# EAGLE board v0_0 (EAGLE 6.2)
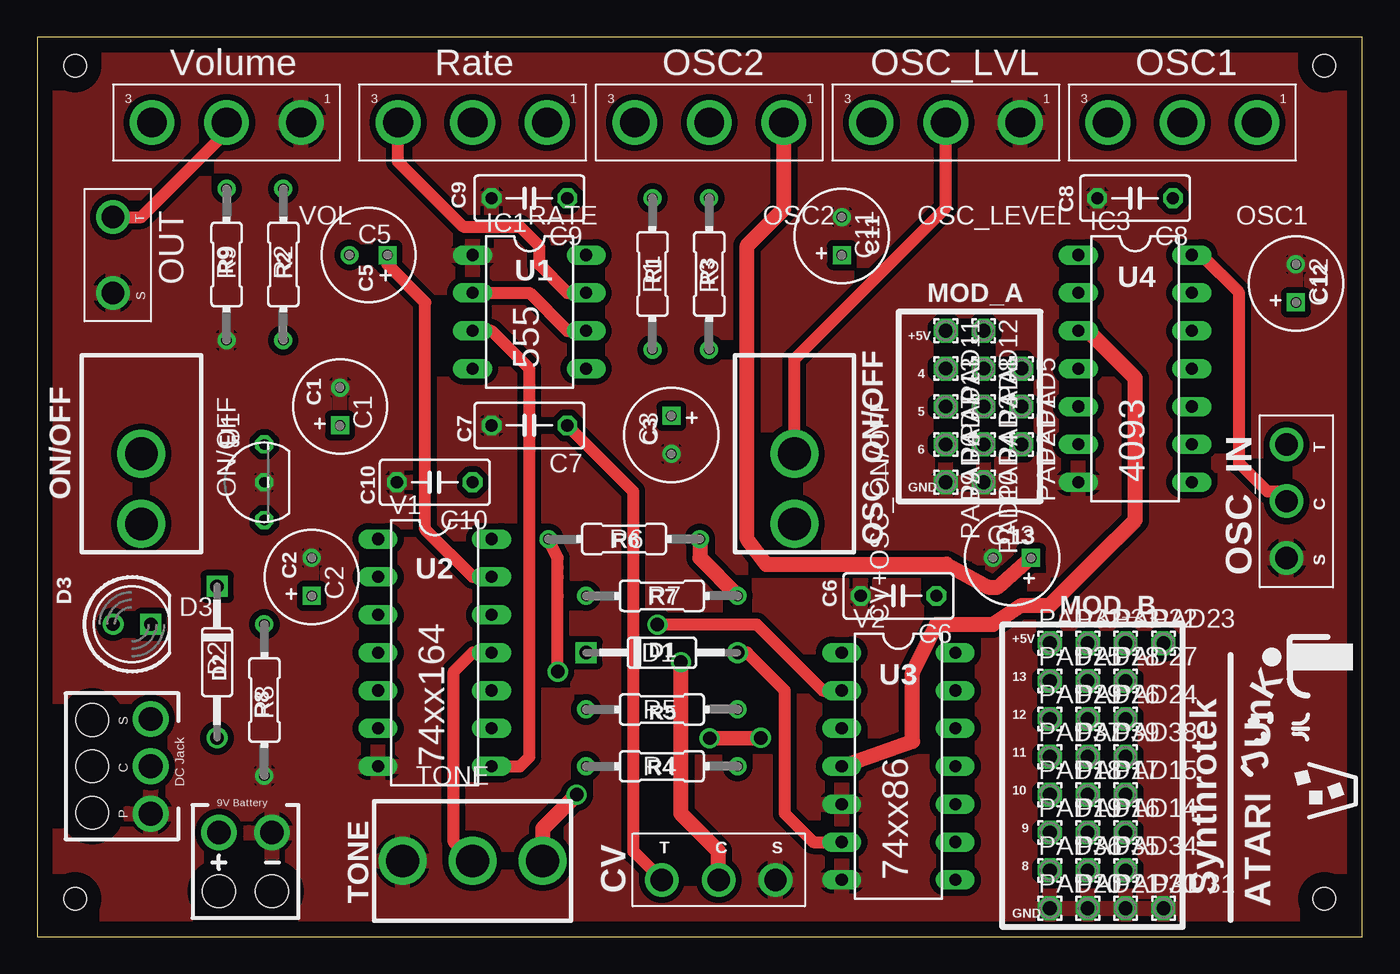
[diagram p0: board, top side]
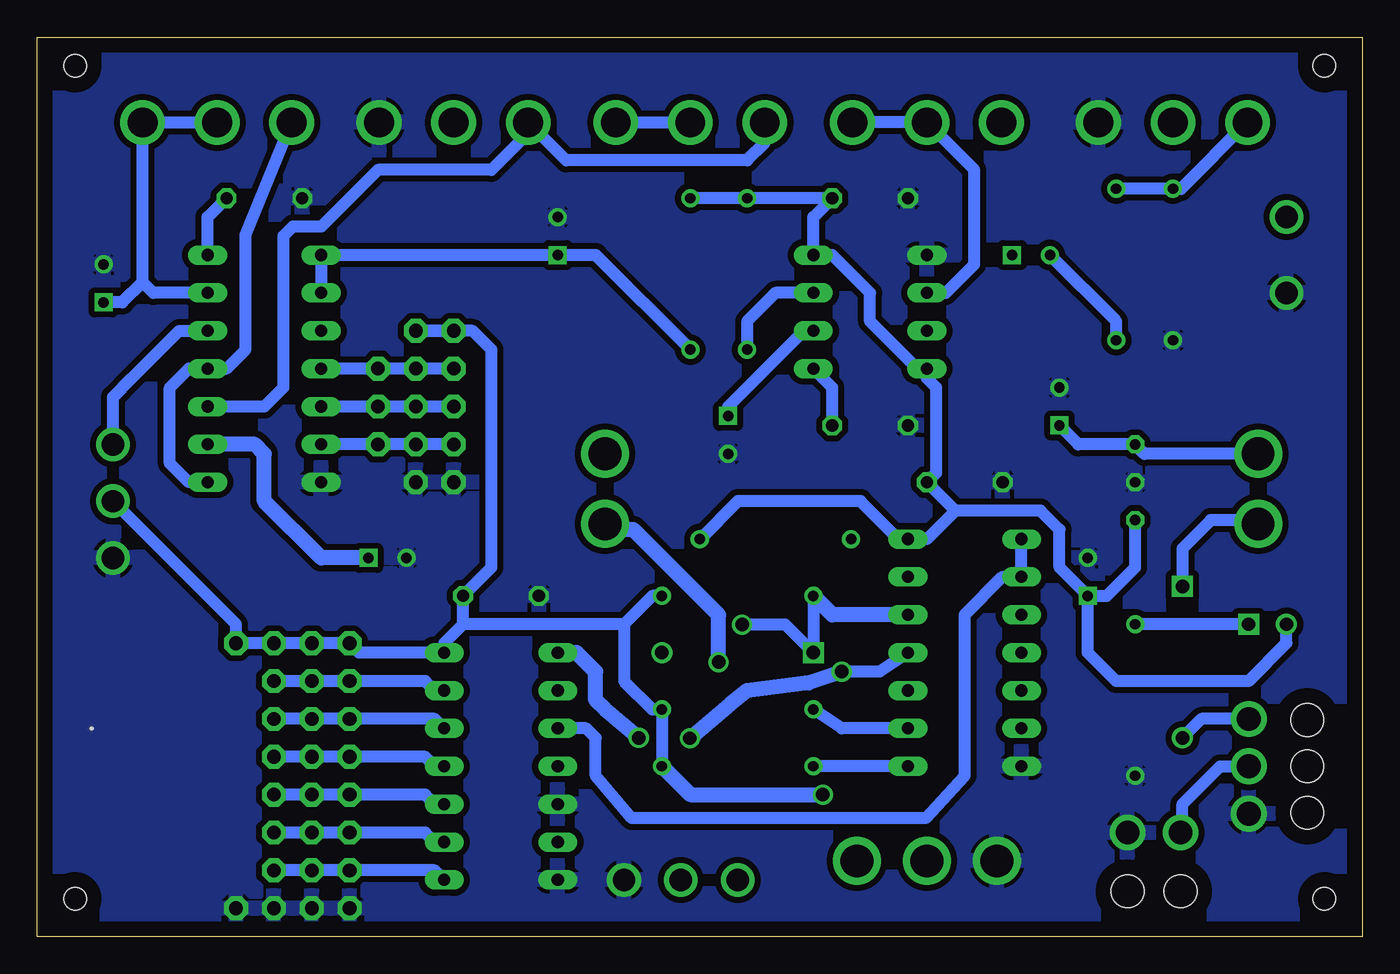
[diagram p1: board, bottom side, seen from below]

Size 88.9 x 60.33 mm. Coordinates in mm from the lower left corner, seen from the top.
Outline: 0,0 88.9,0 88.9,60.33 0,60.33 0,0
Copper layers (1*16): Top 0.035mm / dielectric 1.5mm / Bottom 0.035mm
Design rules: minimum track width 10mil, minimum drill 24mil, track to track 8mil, track to pad 8mil, pad to pad 8mil, via to via 8mil, smd to smd 8mil, copper to edge 40mil, drill to drill 8mil, minimum pad ring 10mil, minimum via ring 8mil, stop-mask expansion 4mil, vias tented up to drill 0mil, thermal gap 10mil
Holes 1.5 mm at 2.54,58.42 86.36,58.42 86.36,2.54 2.54,2.54

## Footprints (pad centres in the part's own frame; a part is rotated, then mirrored left to right if it is on the bottom)
063_025 = drill 0.7 square: + -1.27,0 | drill 0.7: - 1.27,0
C050-030X075 = drill 0.813 octagon: 1 -2.54,0; 2 2.54,0
MONO_JACK_W_SHUNT = drill 1.5: C 0,0; S 3.81,0; T -3.81,0
SPST_TOGGLE_SWITCH = drill 2.2: A 0,0; B 4.7,0
DO35-4 = drill 0.9 pad 1.422: A 5.08,0 | drill 0.9 pad 1.422 square: C -5.08,0
LED5MM = drill 0.9: A -1.27,0 | drill 0.9 square: K 1.27,0
DIL08 = drill 0.813 long: 1 -3.81,-3.81; 2 -1.27,-3.81; 3 1.27,-3.81; 4 3.81,-3.81; 5 3.81,3.81; 6 1.27,3.81; 7 -1.27,3.81; 8 -3.81,3.81
DIL14 = drill 0.813 long: 1 -7.62,-3.81; 2 -5.08,-3.81; 3 -2.54,-3.81; 4 0,-3.81; 5 2.54,-3.81; 6 5.08,-3.81; 7 7.62,-3.81; 8 7.62,3.81; 9 5.08,3.81; 10 2.54,3.81; 11 0,3.81; 12 -2.54,3.81; 13 -5.08,3.81; 14 -7.62,3.81
POT = drill 2: 1 -5,0; 2 0,0; 3 5,0
MONO_JACK = drill 1.5: SLEEVE 2.54,0; TIP -2.54,0
1,6/0,9 = drill 0.914 pad 1.6 octagon: 1 0,0
R0207/4 = drill 0.7: 1 -5.08,0; 2 5.08,0
SPDT_TOGGLE_SWITCH = drill 2.2: A -4.7,0; B 4.7,0; C 0,0
TO-92 = drill 0.7 octagon: 1 -2.54,0; 2 0,0; 3 2.54,0
DC_JACK_OFFBOARD = drill 1.6: CONNECT 0,1.27; PIN 3.175,1.27; SLEEVE -3.175,1.27 | hole 2.2: -3.111,-2.667; 0,-2.667; 3.111,-2.667
9V_BATTERY = drill 1.6: 9V_BATTERY_+ -1.778,1.27; 9V_BATTERY_- 1.778,1.27 | hole 2.2: -1.778,-2.667; 1.778,-2.667

## Placement (x,y rotation side)
C1  100uF  [063_025]  20.32,35.56 90 top
C2  10uF  [063_025]  18.41,24.13 90 top
C3  0.2uF  [063_025]  42.55,33.66 270 top
C5  1.0uF  [063_025]  22.23,45.72 180 top
C6  0.1uF  [C050-030X075]  57.78,22.86 180 top
C7  0.1uF  [C050-030X075]  33.02,34.29 180 top
C8  0.1uF  [C050-030X075]  73.66,49.53 180 top
C9  0.1uF  [C050-030X075]  33.02,49.53 180 top
C10  0.1uF  [C050-030X075]  26.67,30.48 180 top
C11  100uF  [063_025]  53.98,46.99 90 top
C12  2.2uF  [063_025]  84.45,43.81 90 top
C13  0.47uF  [063_025]  65.41,25.4 180 top
CV  MONO_JACK_W_SHUNT  [MONO_JACK_W_SHUNT]  45.72,3.81 0 top
CV+OSC_ON/OFF  SPST_SWITCH  [SPST_TOGGLE_SWITCH]  50.8,32.38 270 top
D1  1N4148-4  [DO35-4]  41.91,19.05 0 top
D2  1N4148-4  [DO35-4]  12.06,18.41 270 top
D3  LED5MM  [LED5MM]  6.35,20.95 0 top
IC1  ICM7555  [DIL08]  33.02,41.91 270 top
IC3  4093N  [DIL14]  73.66,38.1 270 top
ON/OFF  SPST_SWITCH  [SPST_TOGGLE_SWITCH]  6.99,32.38 270 top
OSC1  1M  [POT]  76.83,54.61 180 top
OSC2  1M  [POT]  45.09,54.61 180 top
OSC_IN  MONO_JACK_W_SHUNT  [MONO_JACK_W_SHUNT]  83.82,29.21 270 top
OSC_LEVEL  500k  [POT]  60.96,54.61 180 top
OUT  MONO_JACK  [MONO_JACK]  5.08,45.72 270 top
PAD1  [1,6/0,9]  66.04,35.56 270 top
PAD2  [1,6/0,9]  66.04,33.02 270 top
PAD3  [1,6/0,9]  63.5,35.56 270 top
PAD4  [1,6/0,9]  63.5,33.02 270 top
PAD5  [1,6/0,9]  66.04,38.1 270 top
PAD6  [1,6/0,9]  60.96,33.02 270 top
PAD7  [1,6/0,9]  60.96,35.56 270 top
PAD8  [1,6/0,9]  63.5,38.1 270 top
PAD9  [1,6/0,9]  60.96,30.48 270 top
PAD10  [1,6/0,9]  63.5,30.48 270 top
PAD11  [1,6/0,9]  60.96,40.64 270 top
PAD12  [1,6/0,9]  63.5,40.64 270 top
PAD13  [1,6/0,9]  60.96,38.1 270 top
PAD14  [1,6/0,9]  73.03,6.99 0 top
PAD15  [1,6/0,9]  73.03,9.53 0 top
PAD16  [1,6/0,9]  70.48,6.99 0 top
PAD17  [1,6/0,9]  70.48,9.53 0 top
PAD18  [1,6/0,9]  67.94,9.53 0 top
PAD19  [1,6/0,9]  67.94,6.99 0 top
PAD20  [1,6/0,9]  67.94,1.91 0 top
PAD21  [1,6/0,9]  70.48,1.91 0 top
PAD22  [1,6/0,9]  73.03,19.68 0 top
PAD23  [1,6/0,9]  75.56,19.68 0 top
PAD24  [1,6/0,9]  73.03,14.61 0 top
PAD25  [1,6/0,9]  67.94,17.14 0 top
PAD26  [1,6/0,9]  70.48,14.61 0 top
PAD27  [1,6/0,9]  73.03,17.14 0 top
PAD28  [1,6/0,9]  70.48,17.14 0 top
PAD29  [1,6/0,9]  67.94,14.61 0 top
PAD30  [1,6/0,9]  73.03,1.91 0 top
PAD31  [1,6/0,9]  75.56,1.91 0 top
PAD32  [1,6/0,9]  67.94,19.68 0 top
PAD33  [1,6/0,9]  70.48,19.68 0 top
PAD34  [1,6/0,9]  73.03,4.45 0 top
PAD35  [1,6/0,9]  70.48,4.45 0 top
PAD36  [1,6/0,9]  67.94,4.45 0 top
PAD37  [1,6/0,9]  67.94,12.06 0 top
PAD38  [1,6/0,9]  73.03,12.06 0 top
PAD39  [1,6/0,9]  70.48,12.06 0 top
R1  330  [R0207/4]  41.27,44.45 90 top
R2  10k  [R0207/4]  16.51,45.09 270 top
R3  100k  [R0207/4]  45.09,44.45 90 top
R4  10k  [R0207/4]  41.91,11.43 0 top
R5  1k  [R0207/4]  41.91,15.24 0 top
R6  1k  [R0207/4]  39.37,26.67 180 top
R7  1k  [R0207/4]  41.91,22.86 180 top
R8  1k  [R0207/4]  15.24,15.88 90 top
R9  10k  [R0207/4]  12.7,45.09 270 top
RATE  100k  [POT]  29.21,54.61 180 top
TONE  SPDT_SWITCH  [SPDT_TOGGLE_SWITCH]  29.21,5.08 0 top
U1  78L05ACZ  [TO-92]  15.24,30.48 90 top
U$6  DC_JACK_OFFBOARD  [DC_JACK_OFFBOARD]  6.35,11.43 270 top
U$7  9V_BATTERY_CLIP  [9V_BATTERY]  13.97,5.71 0 top
V1  74164N  [DIL14]  26.67,19.05 270 top
V2  7486N  [DIL14]  57.78,11.43 270 top
VOL  100kA  [POT]  12.7,54.61 180 top

## Library data of the parts
C1-C3 C5 C11-C13 = gm-caps-electro-pol
C6-C10 = resistor
CV CV+OSC_ON/OFF ON/OFF OSC1 OSC2 OSC_IN OSC_LEVEL OUT RATE TONE U1 U$6 U$7 VOL = 00_steve
D1-D3 = gm-diodes
IC1 = maxim
IC3 = 40xx
PAD1-PAD39 = wirepad
R1-R9 = gm-resistors
V1 V2 = 74ttl-din

## Nets
5V: C2.+ C6.1 C8.1 C9.1 C10.1 D3.A IC1.4 IC1.8 IC3.14 OSC_IN.C PAD11.1 PAD12.1 PAD22.1 PAD23.1 PAD32.1 PAD33.1 R1.2 R3.2 R4.2 R5.2 R6.1 R7.1 TONE.B U1.1 V1.14 V2.14
+9V: C1.+ ON/OFF.A U1.3
GND: C1.- C2.- C3.- C6.2 C7.2 C8.2 C9.2 C10.2 C11.- C12.- C13.- CV.S IC1.1 IC3.7 OSC_IN.S OSC_LEVEL.1 OUT.SLEEVE PAD9.1 PAD10.1 PAD20.1 PAD21.1 PAD30.1 PAD31.1 R8.1 R9.2 TONE.A U1.2 U$6.PIN U$7.9V_BATTERY_- V1.7 V2.5 V2.7 VOL.1
N$1: C3.+ IC1.2 IC1.6 RATE.1 RATE.2
N$2: U$6.CONNECT U$7.9V_BATTERY_+
N$3: IC1.3 R4.1 V1.8
N$4: IC1.7 R1.1 RATE.3
N$5: R5.1 V1.9
N$6: PAD15.1 PAD17.1 PAD18.1 V2.10
N$7: C7.1 CV.T IC1.5
N$8: V1.1 V1.2 V2.3
N$9: R6.2 TONE.C V1.11 V2.1
N$10: D1.C R7.2 V1.12 V2.2
N$11: C5.+ V1.13
N$12: C5.- R2.2
N$13: R2.1 R9.1 VOL.3
N$14: OUT.TIP VOL.2
N$15: IC3.12 OSC_IN.T
N$16: C12.+ IC3.13 OSC1.1 OSC1.2
N$17: CV+OSC_ON/OFF.B CV.C
N$18: C11.+ IC3.1 IC3.2 R3.1
N$19: IC3.3 V2.4
N$20: D1.A V2.6
N$21: IC3.8 IC3.11 OSC1.3
N$22: D3.K R8.2
N$23: PAD14.1 PAD16.1 PAD19.1 V2.9
N$24: IC3.4 PAD5.1 PAD8.1 PAD13.1
N$25: IC3.6 PAD2.1 PAD4.1 PAD6.1
N$26: IC3.5 PAD1.1 PAD3.1 PAD7.1
N$27: PAD34.1 PAD35.1 PAD36.1 V2.8
N$28: PAD37.1 PAD38.1 PAD39.1 V2.11
N$29: PAD25.1 PAD27.1 PAD28.1 V2.13
N$30: PAD24.1 PAD26.1 PAD29.1 V2.12
N$31: CV+OSC_ON/OFF.A OSC_LEVEL.2
N$32: C13.+ IC3.9 OSC2.1 OSC2.2
N$34: D2.A U$6.SLEEVE
N$35: D2.C ON/OFF.B
N$36: IC3.10 OSC2.3 OSC_LEVEL.3

## Tracks (layer width: path | path; a pad name or v marks a point on that pad's centre or on a via)
5V  (via drill 0.9)
  Top 0.813: IC3.14 78.11,45.72 80.64,43.18 80.64,31.75 82.55,29.84 83.19,29.84 OSC_IN.C
  Top 1.016: TONE.B 33.91,7.24 v36.2,9.53 | R6.1 44.45,25.4 R7.1
  Bottom 0.813: U1.1 15.24,24.77 17.14,22.86 C2.+ | D3.A 5.08,19.68 7.62,17.14 16.51,17.14 18.41,19.05 C2.+ | C2.+ 20.32,24.77 20.32,27.3 21.59,28.57 27.3,28.57 | 27.3,28.57 C10.1 28.57,31.11 28.57,36.83 29.21,37.47 IC1.4 29.84,38.1 33.02,41.27 33.02,43.18 35.56,45.72 IC1.8 36.83,48.26 C9.1 R1.2 R3.2 | 27.3,28.57 29.21,26.67 V1.14 31.11,26.67 33.66,29.21 41.91,29.21 R6.1 | 61.59,19.68 V2.14 67.31,19.05 PAD32.1 PAD33.1 PAD22.1 PAD23.1 75.56,20.95 OSC_IN.C | 60.33,20.95 61.59,19.68 | 60.33,20.95 C6.1 58.42,24.77 58.42,39.37 59.69,40.64 60.33,40.64 PAD12.1 PAD11.1 | IC3.14 77.47,48.26 C8.1 | R7.1 47.62,22.86 49.53,20.95 | 49.53,20.95 49.53,17.14 47.62,15.24 R5.2 R4.2 | 49.53,20.95 60.33,20.95 | 60.33,20.95 61.59,19.68
  Bottom 1.016: v36.2,9.53 45.09,9.53 R4.2
+9V
  Bottom 0.813: ON/OFF.A 14.61,32.38 U1.3 19.05,33.02 C1.+
GND
  pour Top (isolate 0.406): 0,60.33 88.9,60.33 88.9,0 0,0
  pour Bottom (isolate 0.406): 0,60.33 88.9,60.33 88.9,0 0,0
N$1
  Top 0.813: IC1.6 35.56,40.64 33.02,43.18 IC1.2
  Bottom 0.813: RATE.1 RATE.2 26.04,51.44 26.04,45.09 27.94,43.18 IC1.2 | IC1.6 37.47,40.64 40.64,37.47 42.55,35.56 C3.+
N$2
  Bottom 0.813: U$6.CONNECT 9.53,11.43 12.06,8.89 12.06,7.11 U$7.9V_BATTERY_+
N$3
  Top 0.813: IC1.3 30.48,40.64 32.38,38.73 33.02,38.1 33.02,12.06 32.38,11.43 V1.8
  Bottom 0.813: V1.8 R4.1
N$4
  Top 0.813: RATE.3 24.21,51.99 28.57,47.62 32.38,47.62 33.66,46.35 33.66,45.09 35.56,43.18 IC1.7
  Bottom 0.813: R1.1 41.27,41.27 39.37,43.18 IC1.7
N$5
  Bottom 0.813: V1.9 34.92,13.97 R5.1
N$6
  Bottom 0.813: PAD15.1 PAD17.1 PAD18.1 62.87,9.53 62.23,8.89 V2.10
N$7
  Top 0.813: C7.1 40.01,29.84 40.01,5.71 CV.T
  Bottom 0.813: C7.1 35.56,36.83 IC1.5
N$8
  Bottom 0.813: V1.1 V1.2 24.13,24.13 26.67,21.59 26.67,10.79 29.29,7.95 49.02,7.95 51.44,10.79 51.44,13.34 52.07,13.97 V2.3
N$9  (via drill 0.9)
  Top 0.813: R6.2 34.92,25.4 34.92,24.77 34.92,24.13 34.92,22.86 v34.92,17.78 | V1.11 29.21,19.05 27.94,17.78 27.94,6.35 TONE.C
  Top 1.016: v45.11,13.31 v48.54,13.34
  Bottom 0.813: v34.92,17.78 32.38,17.78 V1.11
  Bottom 1.016: v34.92,17.78 37.13,17.02 41.27,16.51 42.42,15.6 v45.11,13.31 | v48.54,13.34 50.8,15.24 51.44,15.88 51.44,17.78 52.7,19.05 V2.1
N$10  (via drill 0.9)
  Top 0.813: V2.2 52.7,16.51 48.26,20.95 41.6,20.95 v41.6,20.93
  Bottom 0.813: R7.2 D1.C 38.71,20.93 v41.6,20.93
  Bottom 1.016: V1.12 35.56,21.59 R7.2
N$11
  Top 0.813: C5.+ 23.5,45.09 26.04,42.55 26.04,27.3 29.21,24.13 V1.13
N$12
  Bottom 0.813: R2.2 16.51,41.27 C5.-
N$13
  Bottom 0.813: R2.1 R9.1 12.14,50.16 VOL.3
N$14
  Top 0.813: VOL.2 12.7,53.98 6.99,48.26 OUT.TIP
N$15
  Bottom 0.813: IC3.12 79.38,40.64 82.55,37.47 83.82,36.2 OSC_IN.T
N$16
  Bottom 0.813: OSC1.2 OSC1.1 81.83,43.9 | 81.83,43.9 83.19,42.55 C12.+ | IC3.13 81.12,43.18 81.83,43.9
N$17  (via drill 0.9)
  Top 1.016: CV.C 45.72,5.71 43.18,8.26 v43.18,18.41
  Bottom 1.016: v43.18,18.41 43.18,21.59 43.81,22.23 48.9,27.3 50.42,27.3 CV+OSC_ON/OFF.B
N$18
  Bottom 0.813: R3.1 51.44,45.72 C11.+ 68.58,45.72 IC3.1 IC3.2
N$19
  Top 1.016: IC3.3 70.48,40.64 73.66,37.47 73.66,27.94 71.12,25.4 67.94,22.23 66.04,22.23 64.14,20.95 63.5,20.95 62.87,20.95 60.33,20.95 58.73,17.73 58.73,13.11 V2.4
N$20
  Top 0.813: D1.A 47.62,19.05 50.16,16.51 50.16,8.26 52.07,6.35 V2.6
N$21
  Bottom 0.813: IC3.8 78.74,30.48 80.01,31.75 80.01,36.83 78.74,38.1 IC3.11 76.2,38.1 74.93,39.37 74.93,47.07 OSC1.3
N$22
  Bottom 0.813: D3.K R8.2
N$23
  Bottom 0.813: PAD16.1 PAD19.1 62.87,6.99 62.23,6.35 V2.9 | PAD16.1 PAD14.1 PAD16.1
N$24
  Bottom 0.813: IC3.4 67.31,38.1 PAD5.1 PAD8.1 PAD13.1
N$25
  Bottom 0.813: IC3.6 66.67,33.02 PAD2.1 PAD4.1 PAD6.1
N$26
  Bottom 0.813: PAD7.1 PAD3.1 PAD1.1 66.67,35.56 IC3.5
N$27
  Bottom 0.813: PAD35.1 PAD36.1 62.23,4.45 V2.8 | PAD35.1 PAD34.1 PAD35.1
N$28
  Bottom 0.813: V2.11 62.23,11.43 62.87,12.06 PAD37.1 PAD39.1 PAD38.1
N$29
  Bottom 0.813: V2.13 62.23,16.51 62.87,17.14 PAD25.1 PAD28.1 PAD27.1
N$30
  Bottom 0.813: PAD24.1 PAD26.1 PAD29.1 62.23,14.61 V2.12
N$31
  Top 0.813: OSC_LEVEL.2 60.96,48.9 50.8,38.73 CV+OSC_ON/OFF.A
N$32
  Top 1.016: OSC2.1 50.09,48.81 47.62,46.35 47.62,26.67 48.9,24.97 61.01,24.99 63.8,23.44 64.44,23.44 C13.+
  Bottom 0.813: OSC2.1 OSC2.2
  Bottom 1.016: C13.+ 69.85,25.4 73.66,29.21 73.66,32.38 74.3,33.02 IC3.9
N$34
  Bottom 0.813: D2.A 10.79,14.61 U$6.SLEEVE
N$35
  Bottom 0.813: D2.C 12.06,26.04 10.16,27.94 7.24,27.94 ON/OFF.B
N$36
  Bottom 0.813: OSC2.3 40.09,53.26 41.27,52.07 53.42,52.07 OSC_LEVEL.3 55.96,53.9 58.42,51.44 66.04,51.44 69.85,47.62 71.75,47.62 72.39,46.99 72.39,36.83 73.66,35.56 IC3.10

## Text on the board
tPlace: Volume | Rate | OSC2 | OSC_LVL | OSC1 | C9 | C8 | R2 | R1 | R3 | C11 | C12 | R9 | U1 | U4 | C5 | MOD_A | +5V | 555 | C1 | 4 | C7 | C3 | 5 | U5 | C10 | 6 | GND | 4093 | ON/OFF | C13 | C2 | R6 | OSC_ON/OFF | D3 | U2 | C6 | R7 | MOD_B | D1 | +5V | D2 | U3 | 13 | K | R8 | R5 | 12 | n | U | 11 | 74xx164 | R4 | J | 10 | 9 | 74xx86 | 8 | Synthrotek | TONE | ATARI | GND